# EAGLE board lock_board2 (EAGLE 7.6.0)
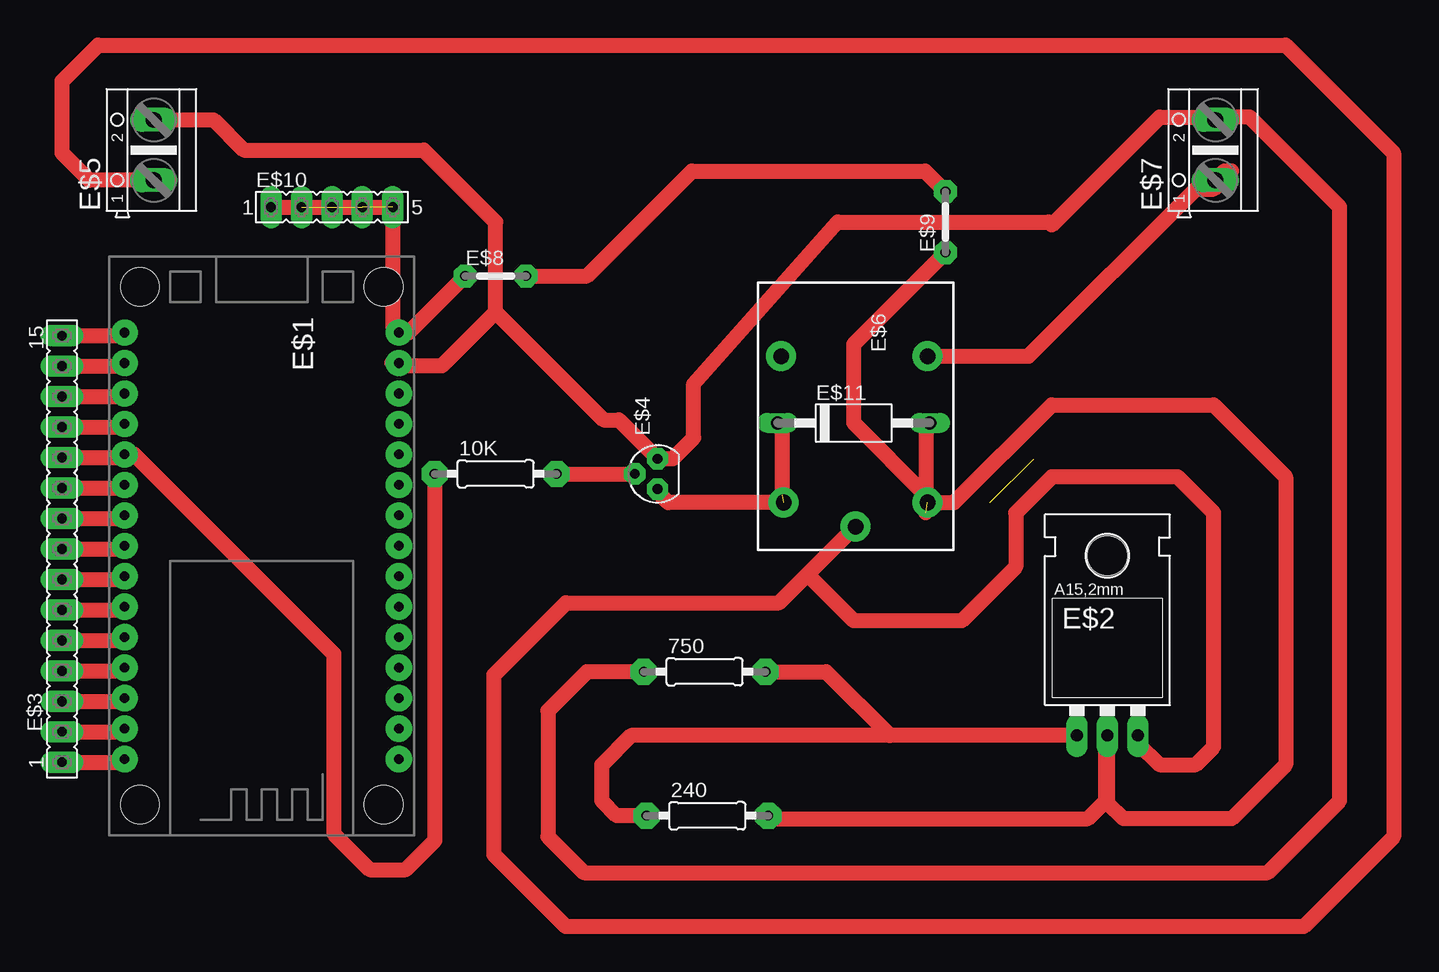
[diagram p0: board, top side]

No outline drawn. Coordinates in mm, seen from the top.
Copper layers (1*16): Top 0.035mm / dielectric 1.5mm / Bottom 0.035mm
Design rules "default": minimum track width 10mil, minimum drill 24mil, track to track 8mil, track to pad 8mil, pad to pad 8mil, via to via 8mil, smd to smd 8mil, copper to edge 40mil, drill to drill 8mil, minimum pad ring 10mil, minimum via ring 8mil, stop-mask expansion 4mil, vias tented up to drill 0mil, thermal gap 10mil
Net classes: 0 default: clearance 0.205 mm

## Footprints (pad centres in the part's own frame; a part is rotated, then mirrored left to right if it is on the bottom)
0207/10 = drill 0.813 pad 2.184 octagon: 1 -5.08,0; 2 5.08,0
ESP12E_DEVKIT = drill 0.8 pad 2.184: 3V3@0 -11.43,-7.62; 3V3@1 11.43,5.08; 3V3@2 11.43,-17.78; AD0 -11.43,17.78; CLK -11.43,-2.54; CMD -11.43,2.54; D0 11.43,17.78; D1 11.43,15.24; D2 11.43,12.7; D3 11.43,10.16; D4 11.43,7.62; D5 11.43,0; D6 11.43,-2.54; D7 11.43,-5.08; D8 11.43,-7.62; EN -11.43,-10.16; GND@0 -11.43,-5.08; GND@1 -11.43,-15.24; GND@2 11.43,2.54; GND@3 11.43,-15.24; RST -11.43,-12.7; RSV@0 -11.43,15.24; RSV@1 -11.43,12.7; RX 11.43,-10.16; SD0 -11.43,0; SD1 -11.43,5.08; SD2 -11.43,7.62; SD3 -11.43,10.16; TX 11.43,-12.7; VIN -11.43,-17.78 | hole 3.2: -10.16,21.59; 10.16,21.59; 10.16,-21.59; -10.16,-21.59
317TL = drill 1.016 pad 1.778 long: 1 -2.54,-3.81; 2 0,-3.81; 3 2.54,-3.81 | hole 3.302: 0,11.176
FE15 = drill 0.813 pad 1.778 long: 1 -17.78,0; 2 -15.24,0; 3 -12.7,0; 4 -10.16,0; 5 -7.62,0; 6 -5.08,0; 7 -2.54,0; 8 0,0; 9 2.54,0; 10 5.08,0; 11 7.62,0; 12 10.16,0; 13 12.7,0; 14 15.24,0; 15 17.78,0
BC337 = drill 0.813 pad 1.778 octagon: B 0,1.905; C -1.27,0; E 1.27,0
AK500/2 = drill 1.321 long: 1 -2.515,0; 2 2.515,0
ZN5 = drill 1.3 pad 2.5: 11 8.89,0; 12 -5.31,-6.2; 14 -5.31,6; A1 6.89,6; A2 6.89,-6
05 = drill 0.813 pad 1.93 octagon: 1 -2.54,0; 2 2.54,0
FE05-1 = drill 0.813 pad 1.778 long: 1 -5.08,0; 2 -2.54,0; 3 0,0; 4 2.54,0; 5 5.08,0
P1-12E = drill 1.118 long: A 6.35,0; C -6.35,0

## Placement (x,y rotation side)
10K  [0207/10]  55.65,60.26 0 top
240  [0207/10]  73.3,31.76 0 top
750  [0207/10]  73.07,43.76 0 top
E$1  [ESP12E_DEVKIT]  36.15,54.26 180 top
E$2  [317TL]  106.65,42.26 0 top
E$3  [FE15]  19.5,54 90 top
E$4  [BC337]  69.15,60.26 90 top
E$5  [AK500/2]  27.15,87.26 90 top
E$6  [ZN5]  85.65,64.76 270 top
E$7  [AK500/2]  115.65,87.26 90 top
E$8  [05]  55.65,76.76 0 top
E$9  [05]  93.15,81.26 90 top
E$10  [FE05-1]  42,82.5 0 top
E$11  [P1-12E]  85.5,64.5 0 top

## Library data of the parts
10K 240 750 = eagle-ltspice
E$1 = ESP12E_DEVKIT
E$2 = v-reg
E$3 E$10 = con-lsta
E$4 = transistor-small-signal
E$5 E$7 = con-ptr500
E$6 = relay
E$8 E$9 = jumper
E$11 = diode

## Nets
S$1: E$1.D0 E$3.1
S$2: 750.1 E$1.GND@1 E$4.E E$5.2 E$7.2
S$3: 10K.2 E$4.B
S$4: 10K.1 E$1.D8 E$3.11
S$5: E$4.C E$6.A2 E$11.C
S$6: E$6.14 E$7.1
S$7: 240.2 E$2.2 E$6.A1 E$9.1 E$11.A
S$8: 240.1 750.2 E$2.1
S$9: E$8.2 E$9.2
S$10: E$1.VIN E$8.1 E$10.1 E$10.2 E$10.3 E$10.4 E$10.5
S$11: E$1.D1 E$3.2
S$12: E$1.D2 E$3.3
S$13: E$1.D3 E$3.4
S$14: E$1.D4 E$3.5
S$15: E$1.3V3@1 E$3.6
S$16: E$1.GND@2 E$3.7
S$17: E$1.D5 E$3.8
S$18: E$1.D6 E$3.9
S$19: E$1.D7 E$3.10
S$20: E$1.RX E$3.12
S$21: E$1.TX E$3.13
S$23: E$2.3 E$5.1 E$6.11
S$24: E$1.3V3@2 E$3.15
S$25: E$1.GND@3 E$3.14

## Tracks (layer width: path | path; a pad name or v marks a point on that pad's centre or on a via)
S$1
  Top 1.27: E$3.1 24.46,36.22 E$1.D0
S$2
  Top 1.27: E$5.2 32.13,89.78 34.65,87.26 49.65,87.26 55.65,81.26 55.65,73.76 | 55.65,73.76 51.15,69.26 47.82,69.26 E$1.GND@1 47,69.5 | 55.65,73.76 64.65,64.76 65.92,64.76 E$4.E 70.42,61.53 72.15,63.26 72.15,67.76 84.15,81.26 101.74,81.26 102,81 111,90 115.42,90 E$7.2 115.88,90 118.5,90 126,82.5 126,33 120,27 63,27 60,30 60,40.5 63.26,43.76 750.1
S$3
  Top 1.27: 10K.2 E$4.B
S$4
  Top 1.27: 10K.1 50.57,29.68 48.15,27.26 45.15,27.26 42.15,30.26 42.15,45.26 25.53,61.88 E$1.D8 24.46,61.62 E$3.11
S$5  (1 unrouted)
  Top 1.27: E$6.A2 70.04,57.87 69.15,58.76 E$4.C | E$11.C 79.5,64.5 79.5,58.5
S$6
  Top 1.27: E$6.14 100.07,70.07 114,84 115.5,84 117,85.5 116.41,85.5 E$7.1
S$7  (1 unrouted)
  Top 1.27: 240.2 78.64,31.5 105,31.5 106.5,33 106.5,38.3 E$2.2 106.65,32.85 108,31.5 117,31.5 121.5,36 121.5,60 115.5,66 102,66 93.87,57.87 E$6.A1 91.65,58.35 85.5,64.5 85.5,71.07 E$9.1 | E$11.A 91.5,64.5 91.5,57
S$8
  Top 1.27: 240.1 65.74,31.76 64.5,33 64.5,36 66.95,38.45 88.5,38.45 | E$2.1 88.5,38.45 | 750.2 83.19,43.76 88.5,38.45
S$9
  Top 1.27: E$9.2 91.45,85.5 72,85.5 63.26,76.76 E$8.2
S$10  (3 unrouted)
  Top 1.27: E$8.1 48.39,72.04 E$1.VIN 47.08,72.54 E$10.5 E$10.1
S$11
  Top 1.27: E$3.2 24.46,38.76 E$1.D1
S$12
  Top 1.27: E$3.3 24.46,41.3 E$1.D2
S$13
  Top 1.27: E$3.4 24.46,43.84 E$1.D3
S$14
  Top 1.27: E$3.5 24.46,46.38 E$1.D4
S$15
  Top 1.27: E$3.6 24.46,48.92 E$1.3V3@1
S$16
  Top 1.27: E$3.7 24.46,51.46 E$1.GND@2
S$17
  Top 1.27: E$3.8 24.46,54 E$1.D5
S$18
  Top 1.27: E$3.9 24.46,56.54 E$1.D6
S$19
  Top 1.27: E$3.10 24.46,59.08 E$1.D7
S$20
  Top 1.27: E$3.12 24.46,64.16 E$1.RX
S$21
  Top 1.27: E$3.13 24.46,66.7 E$1.TX
S$22  (1 unrouted)
S$23
  Top 1.27: 85.65,55.76 E$6.11 81.64,51.86 | E$5.1 21.75,84.75 19.5,87 19.5,93 22.5,96 121.5,96 130.5,87 130.5,30 123,22.5 61.5,22.5 55.5,28.5 55.5,43.5 61.5,49.5 79.28,49.5 81.64,51.86 | E$2.3 109.19,37.81 111,36 114,36 115.5,37.5 115.5,57 112.5,60 102,60 99,57 99,52.5 94.5,48 85.5,48 81.64,51.86
S$24
  Top 1.27: E$3.15 24.46,71.78 E$1.3V3@2
S$25
  Top 1.27: E$3.14 24.46,69.24 E$1.GND@3